# Altium PCB STLINK_Adapter.PcbDoc
Units mm, origin at the board's own origin, x right, y up, seen from the top; angles counter-clockwise.
Board outline 59 x 103 mm, 2 copper layers (Top Layer, Bottom Layer), stack 1.579 mm thick; 31 components, 35 nets, 170 pads, 235 vias.
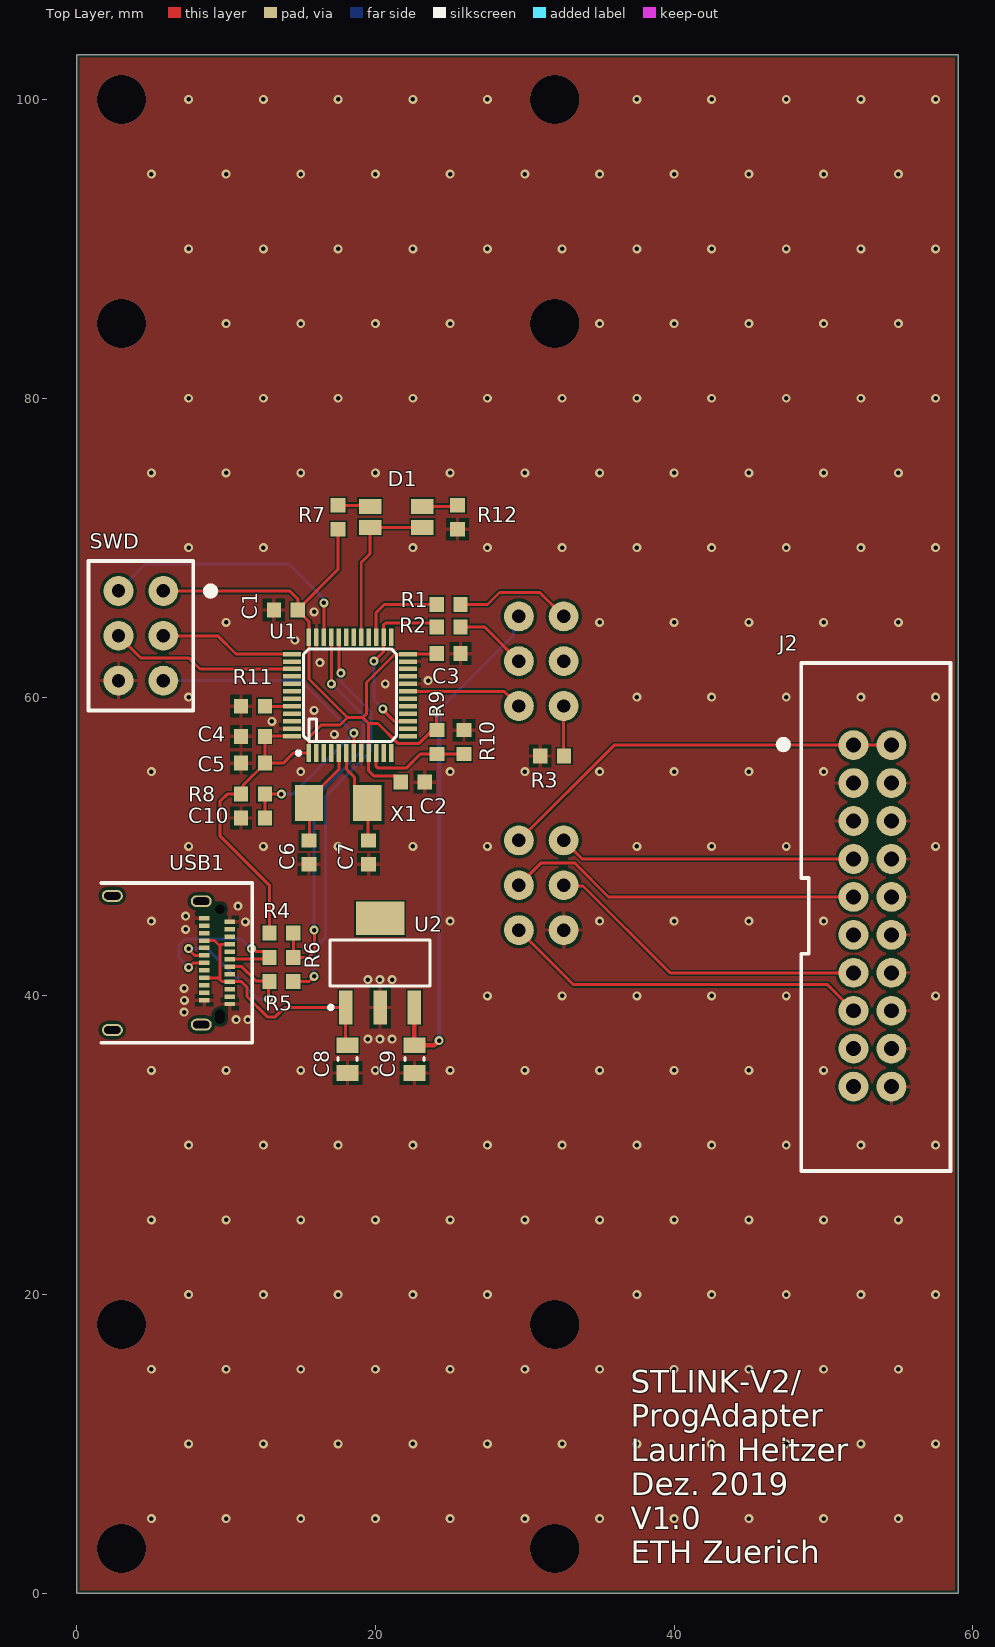
[diagram p0: Top Layer view]
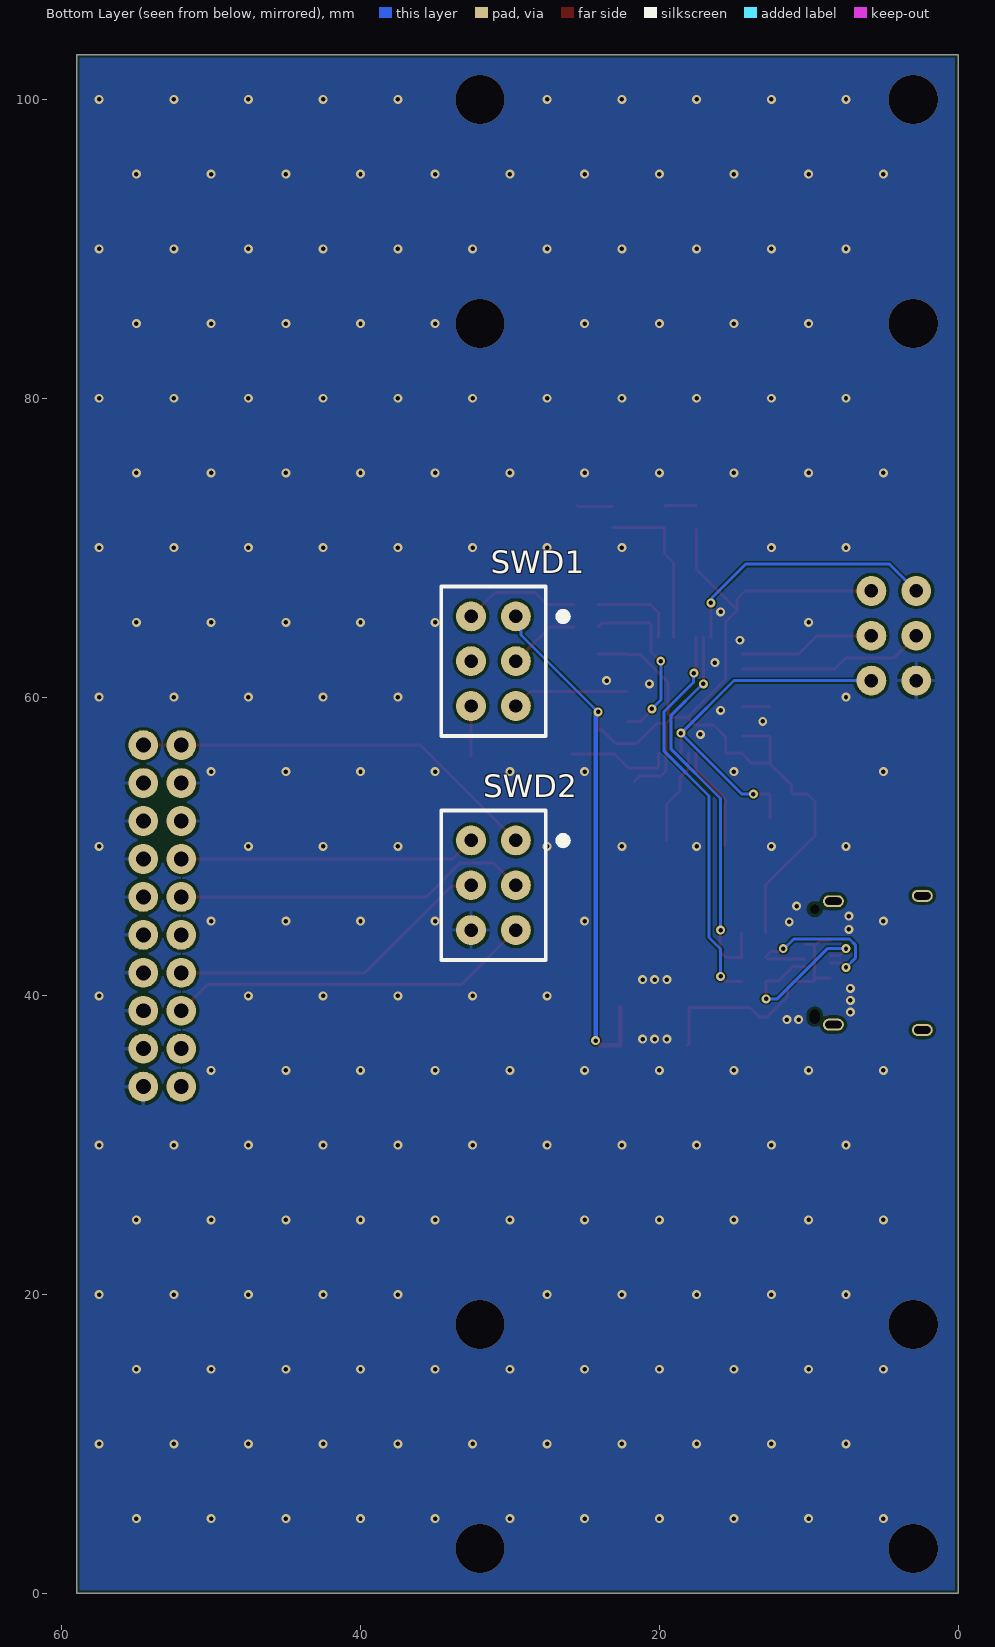
[diagram p1: Bottom Layer view, seen from below]
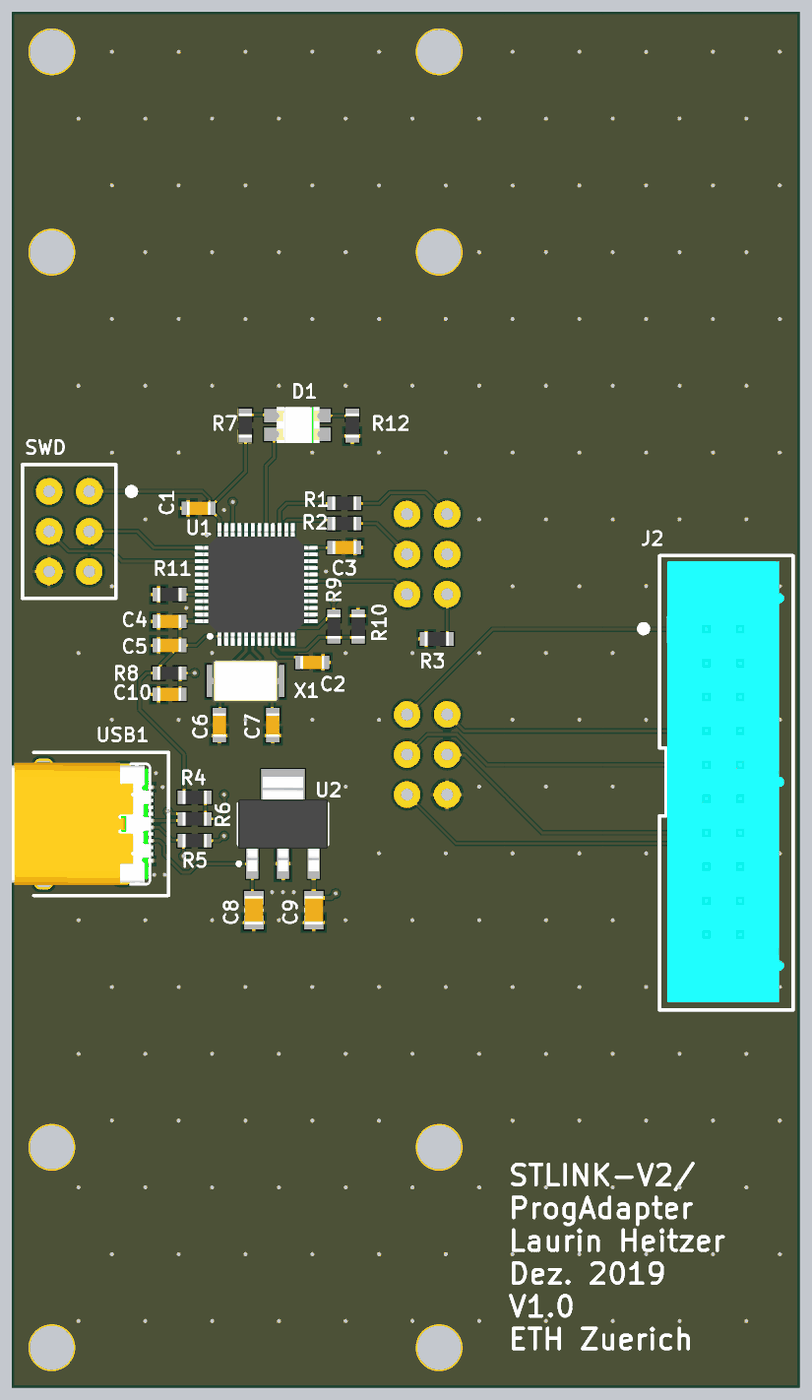
[diagram p2: 3D render of the assembled board from above, using the file's embedded part models]

## Layer stack, top to bottom
Top Solder: solder mask 0.0102, Solder Resist, Dk 3.5
Top Layer: signal copper 0.0356
Dielectric 1: dielectric 1.508, FR-4, Dk 4.8
Bottom Layer: signal copper 0.0356
Bottom Solder: solder mask 0.0102, Solder Resist, Dk 3.5

## Board outline
0,0 59,0 59,103 0,103

## Design rules (kind name [scope] priority, off if disabled: settings)
BoardOutlineClearance [All] p1: gap=0.2 ignorepadtopadclearanceinfootprint=FALSE
Clearance Clearance_1 [(InNet('OSC_IN') OR InNet('OSC_OUT'))] p1: gap=0.1 ignorepadtopadclearanceinfootprint=FALSE except(0.2: Arc-Poly Track-Poly SMDPad-Poly THPad-Poly)
Clearance [All] p2: gap=0.1 ignorepadtopadclearanceinfootprint=FALSE except(0.09: Arc-Poly; 0.2: THPad-Poly)
HoleSize [All] p1: absolutevalues=TRUE maxlimit=6.3 minlimit=0.2 maxpercent=80.000 minpercent=20.000
MinimumSolderMaskSliver [All] p1: minsoldermaskwidth=0.1
PolygonConnect [All] p1: thpad.connectstyle=Relief thpad.reliefconductorwidth=0.254 thpad.reliefentries=4 thpad.polygonreliefangle="90 Angle" thpad.airgapwidth=0.254 smdpad.connectstyle=Relief smdpad.reliefconductorwidth=0.254 smdpad.reliefentries=4 smdpad.polygonreliefangle="90 Angle" smdpad.airgapwidth=0.254 via.connectstyle=Direct via.reliefconductorwidth=0.254 via.reliefentries=4 via.polygonreliefangle="90 Angle" via.airgapwidth=0.254
RoutingVias [All] p1: holewidth=0.3 width=0.6 viastyle="Through Hole" minholewidth=0.3 minwidth=0.6 maxholewidth=6.3 maxwidth=9
SilkToSolderMaskClearance STM_SilkToSolderMaskClearance [HasFootprint('STM32F103CBT_LQFP48')] p1: minsilkscreentomaskgap=0 clearancetoexposedcopper=TRUE
SilkToSolderMaskClearance [IsPad] p2: minsilkscreentomaskgap=0.1 clearancetoexposedcopper=TRUE
SolderMaskExpansion [All] p1: expansion=0.102
Width [All] p1: maxlimit=1 minlimit=0.127 preferedwidth=0.2
27 further rules are at their usual default settings.

## Components (designator, comment, footprint, x,y, rotation, side; value= is the part's Value field where it differs from the comment)
C1 "Capacitor_0603" C_0603_Chip2PinSM127P600-8N 14,65.82 r180 top
C2 "Capacitor_0603" C_0603_Chip2PinSM127P600-8N 22.5,54.3 r0 top
C3 "Capacitor_0603" C_0603_Chip2PinSM127P600-8N 24.9,62.9 r0 top
C4 "Capacitor_0603" C_0603_Chip2PinSM127P600-8N 11.8,57.369 r180 top
C5 "Capacitor_0603" C_0603_Chip2PinSM127P600-8N 11.8,55.573 r180 top
C6 "Capacitor_0603" C_0603_Chip2PinSM127P600-8N 15.55,49.6 r90 top
C7 "Capacitor_0603" C_0603_Chip2PinSM127P600-8N 19.55,49.6 r90 top
C8 "Capacitor_0805" 10uF_0805_Chip2PinSM127P600-8N 18.127,35.754 r270 top
C9 "Capacitor_0805" 10uF_0805_Chip2PinSM127P600-8N 22.611,35.754 r270 top
C10 "Capacitor_0603" C_0603_Chip2PinSM127P600-8N 11.8,51.9 r180 top
D1 "LTST_LED_RED_GREEN" LTST_LED_GREEN_RED 21.396,72.061 r0 top
J2 "JTAG_Header" JTAG_Header 52,56.78 r270 top
R1 "Resistor_0603" R_0603_Chip2PinSM127P600-8N 24.9,66.2 r180 top
R2 "Resistor_0603" R_0603_Chip2PinSM127P600-8N 24.9,64.7 r0 top
R3 "Resistor_0603" R_0603_Chip2PinSM127P600-8N 31.829,56.051 r0 top
R4 "Resistor_0603" R_0603_Chip2PinSM127P600-8N 13.7,44.2 r180 top
R5 "Resistor_0603" R_0603_Chip2PinSM127P600-8N 13.7,40.95 r0 top
R6 "Resistor_0603" R_0603_Chip2PinSM127P600-8N 13.7,42.575 r0 top
R7 "Resistor_0603" R_0603_Chip2PinSM127P600-8N 17.5,72.036 r270 top
R8 "Resistor_0603" R_0603_Chip2PinSM127P600-8N 11.8,53.5 r180 top
R9 "Resistor_0603" R_0603_Chip2PinSM127P600-8N 24.125,56.983 r90 top
R10 "Resistor_0603" R_0603_Chip2PinSM127P600-8N 25.925,56.983 r270 top
R11 "Resistor_0603" R_0603_Chip2PinSM127P600-8N 11.8,59.384 r0 top
R12 "Resistor_0603" R_0603_Chip2PinSM127P600-8N 25.5,72.036 r90 top
SWD "ProgrammingHeader" ProgrammingHeader 5.8,67.1 r270 top
SWD1 "ProgrammingHeader" ProgrammingHeader 29.6,65.4 r270 bottom
SWD2 "ProgrammingHeader" ProgrammingHeader 29.6,50.4 r270 bottom
U1 "STM32F103C8T6" STM32F103CBT_LQFP48 18.3,60.127 r90 top locked
U2 "MIC2920A" MIC2920A_SOT230P710X170-4N 20.311,42.2 r90 top
USB1 "USB-C_simplified" USB-C_receptacle 10.25,44.95 r270 top
X1 "Crystal_8MHz" Crystal_8MHz 17.5,52.9 r180 top

## Footprints (in the part's own frame and the unit in brackets; to place one, negate y for a bottom-side part, rotate by r counter-clockwise, add the part's x,y. Pads: shape width x height; smd on the part's side, far side on the other; paste and mask are expansions set on the pad)
10uF_0805_Chip2PinSM127P600-8N [mm]
  rect 1.05x1.45 smd: 1(-0.925,0) 2(0.925,0)
  silkscreen extent -0.1,-0.63 0.1,0.63, body extent -1.07,-0.7 1.07,0.7, height 1.4
C_0603_Chip2PinSM127P600-8N [mm]
  rect 0.95x1 smd: 1(-0.8,0) 2(0.8,0)
  body extent -0.9,-0.5 0.9,0.5, height 1
Crystal_8MHz [mm]
  rect 1.9x2.4 smd: 1(-1.95,0) 2(1.95,0)
  body extent -2.5,-1.6 2.5,1.6, height 1.4
JTAG_Header [mm]
  round 2 hole 1 mask+0.05: 1(0,0) 2(0,2.54) 3(2.54,0) 4(2.54,2.54) 5(5.08,0) 6(5.08,2.54) 7(7.62,0) 8(7.62,2.54) 9(10.16,0) 10(10.16,2.54) 11(12.7,0) 12(12.7,2.54) 13(15.24,0) 14(15.24,2.54) 15(17.78,0) 16(17.78,2.54) 17(20.32,0) 18(20.32,2.54) 19(22.86,0) 20(22.86,2.54)
  silkscreen extent -5.5,-5.19 28.5,6.5, body extent -5.07,-2.97 27.92,5.84, height 8.89
LTST_LED_GREEN_RED [mm]
  rect 1.5x1 smd: 1(-1.75,0.7) 2(-1.75,-0.7) 3(1.75,0.7) 4(1.75,-0.7)
  body extent -1.55,-1.35 1.65,1.35, height 1.1
MIC2920A_SOT230P710X170-4N [mm] "SOT223, 4-Leads, Body 6.50x7.10mm (avg), Pitch 2.30mm, IPC Medium Density"
  rect 2.25x0.9 smd: 1(-2.98,2.3) 2(-2.98,0) 3(-2.98,-2.3)
  rect 2.25x3.25 smd: 4(2.98,0)
  silkscreen extent -3.1,-3.35 1.55,3.42, body extent -3.55,-3.35 3.55,3.35, height 1.7
ProgrammingHeader [mm]
  round 2 hole 0.9 mask+0.05: 1(0,0) 2(0,-3) 3(3,0) 4(3,-3) 5(6,0) 6(6,-3)
  silkscreen extent -2,-5 8,3.66
R_0603_Chip2PinSM127P600-8N [mm]
  rect 0.95x1 smd: 1(-0.8,0) 2(0.8,0)
  body extent -0.9,-0.5 0.9,0.5, height 1
STM32F103CBT_LQFP48 [mm]
  rect 1.2x0.3 smd mask+0.02: 1(-3.875,2.75) 2(-3.875,2.25) 3(-3.875,1.75) 4(-3.875,1.25) 5(-3.875,0.75) 6(-3.875,0.25) 7(-3.875,-0.25) 8(-3.875,-0.75) 9(-3.875,-1.25) 10(-3.875,-1.75) 11(-3.875,-2.25) 12(-3.875,-2.75) 25(3.875,-2.75) 26(3.875,-2.25) 27(3.875,-1.75) 28(3.875,-1.25) 29(3.875,-0.75) 30(3.875,-0.25) 31(3.875,0.25) 32(3.875,0.75) 33(3.875,1.25) 34(3.875,1.75) 35(3.875,2.25) 36(3.875,2.75)
  rect 0.3x1.2 smd mask+0.02: 13(-2.75,-3.875) 14(-2.25,-3.875) 15(-1.75,-3.875) 16(-1.25,-3.875) 17(-0.75,-3.875) 18(-0.25,-3.875) 19(0.25,-3.875) 20(0.75,-3.875) 21(1.25,-3.875) 22(1.75,-3.875) 23(2.25,-3.875) 24(2.75,-3.875) 37(2.75,3.875) 38(2.25,3.875) 39(1.75,3.875) 40(1.25,3.875) 41(0.75,3.875) 42(0.25,3.875) 43(-0.25,3.875) 44(-0.75,3.875) 45(-1.25,3.875) 46(-1.75,3.875) 47(-2.25,3.875) 48(-2.75,3.875)
  silkscreen extent -4,-3.1 3.1,3.57, body extent -4.6,-4.6 4.6,4.6, height 1.55
USB-C_receptacle [mm]
  rect 0.3x0.7 smd mask+0.05: A1(0,0) A2(0.5,0) A3(1,0) A4(1.5,0) A5(2,0) A6(2.5,0) A7(3,0) A8(3.5,0) A9(4,0) A10(4.5,0) A11(5,0) A12(5.5,0) B1(5.25,-1.7) B2(4.75,-1.7) B3(4.25,-1.7) B4(3.75,-1.7) B5(3.25,-1.7) B6(2.75,-1.7) B7(2.25,-1.7) B8(1.75,-1.7) B9(1.25,-1.7) B10(0.75,-1.7) B11(0.25,-1.7) B12(-0.25,-1.7)
  rrect100% 0.8x1.4 hole 0.5 slot 1.1 at 90 deg mask+0.05: S1(-1.38,-1.91) S2(6.88,-1.91) S3(-1.74,-7.86) S4(7.24,-7.86)
  round 0.3 hole 0.65 mask+0.05: ""(-0.85,-0.66)
  round 0.3 hole 0.65 slot 0.95 at 0 deg mask+0.05: ""(6.35,-0.66)
  silkscreen extent -2.6,-8.6 8.1,1.5, body extent -1.85,-10.25 7.35,0.3, height 3.25

## Part data
C1 C2 C3 C4 C5 C10: Capacity=100nF
C6 C7: Capacity=16pF
C8 C9: Capacity=10µF
R1 R2 R5 R6: Resistance=22
R3: Resistance=10k
R4: Resistance=1k5
R7 R12: Resistance=50
R8 R11: Resistance=100k
R9 R10: Resistance=4k7
U2: library part MIC2920_3V3_VoltageReg, ComponentLink1Description=Datasheet, ComponentLink1URL=http://ww1.microchip.com/downloads/en/DeviceDoc/mic2920.pdf, ComponentLink2Description="MIC2920A-3.3WS-TR - Digikey", ComponentLink2URL=https://www.digikey.ch/product-detail/de/microchip-technology/MIC2920A-3.3WS-TR/576-1116-1-ND/771849
USB1: "USB Type C receptacle simplified with just data and supply pins", ComponentLink1Description="Datasheet (Drawing)", ComponentLink1URL=https://www.amphenol-icc.com/media/wysiwyg/files/drawing/12401610e4x2a.pdf, ComponentLink2Description="USB - C, USB 3.1 Gen 2 - Digikey", ComponentLink2URL=https://www.digikey.ch/product-detail/de/amphenol-icc-commercial-products/12401610E4-2A/12401610E4-2ACT-ND/5775520
X1: "8MHz Crystall SMD", ComponentLink1Description=Datasheet, ComponentLink1URL=https://ecsxtal.com/store/pdf/ecx-53r.pdf, ComponentLink2Description="ECS-.327-6-34QCN-TR - Digikey", ComponentLink2URL=https://www.digikey.ch/product-detail/de/ecs-inc/ECS-80-18-30-JGN-TR/XC2103CT-ND/5875587

## Via types
v1: diameter 0.6, hole 0.3, Top Layer to Bottom Layer, tented both sides, 227 vias
v2: diameter 3.3, hole 3.3, Top Layer to Bottom Layer, 8 vias

## Nets (pads, with @x,y where several pads share a name; then routed paths per layer and width w, separated by ;. In a path a pad name is that pad's centre, name@x,y a point inside that pad or via, vN(x,y) a via of type N, cw(c..) or ccw(c..) an arc to the next point about the centre after c; other vN are vias at no path point)
3.3V: C1.1 C2.1 C3.1 C4.1 C5.1 C9.1 R4.2 R7.2 R8.2 R9.2 SWD1.1 SWD.1 U1.1 U1.9 U1.24 U1.36 U1.48 U2.3 | length 107.6
  Top Layer w0.2: SWD.1 14.269,67.1 14.8,66.569 C1.1@14.8,65.845 ; R4.2 12.9,47.4 9.583,50.717 9.583,53 10.083,53.5 R8.2 11.138,53.638 11.138,54.086 12.6,55.548 C5.1 ; U1.48 12.608,57.377 C4.1 C5.1 ; R7.2 17.5,68.545 C1.1@14.8,65.845 ; C2.1 21.7,54.325 21.325,54.7 21.3,54.7 21.296,54.704 19.9,54.704 19.55,55.054 U1.9 19.55,58.227 ; v1(24.1,59) 24.1,57.808 R9.2 23.812,57.783 22.929,56.9 21.493,56.9 20.167,58.227 19.55,58.227 ; C3.1 24.077,62.877 U1.24 22.146,62.848 21.275,62.848 19.4,60.973 19.4,58.877 19.15,58.627 ; C5.1 13.821,55.573 14.5,56.252 U1.1 15.55,57.307 16.366,58.123 17.629,58.123 18.133,58.627 ; C1.1@14.8,65.845 C1.1 14.8,65.795 15.55,65.045 U1.36 15.55,61.209 18.133,58.627 ; 18.133,58.627 19.15,58.627 ; 19.15,58.627 19.55,58.227
  Top Layer w0.3: U2.3 C9.1 23.935,36.679 v1(24.256,37)
  Bottom Layer w0.2: v1(24.1,59) 29.256,64.156 29.256,65.056 SWD1.1
  Bottom Layer w0.3: v1(24.1,59) 24.1,58.919 24.256,58.763 v1(24.256,37)
3V3: J2.1 J2.2 SWD2.1 | length 27.6
  Top Layer w0.2: SWD2.1 35.98,56.78 J2.1 J2.2
+5: C8.1 U2.1 USB1.A4 USB1.A9 USB1.B4 USB1.B9 | length 17.9
  Top Layer w0.2: USB1.B4 9.477,41.2 9.6,41.077 ; USB1.B9 9.233,43.7 9.6,43.333 ; USB1.A4 9.717,43.45 9.6,43.333 ; C8.1 18.011,36.795 U2.1 13.931,39.22 13.3,38.589 12.765,38.589 11.4,39.954 11.4,40.573 11.023,40.95 USB1.A9 9.727,40.95 9.6,41.077 ; 9.6,41.077 9.6,43.333
BOOT0: R11.2 U1.44 | length 1.8
  Top Layer w0.2: R11.2 12.607,59.377 U1.44
GND: C1.2 C2.2 C3.2 C4.2 C5.2 C6.1 C7.1 C8.2 C9.2 C10.2 J2.3 J2.4 J2.5 J2.6 J2.8 J2.10 J2.12 J2.14 J2.16 J2.18 J2.20 R3.1 R10.1 R11.1 R12.1 SWD2.6 SWD.6 U1.8 U1.20 U1.23 U1.35 U1.47 U2.2 USB1.A1 USB1.A12 USB1.B1 USB1.B12
  other v1: 5,5 10,5 15,5 20,5 25,5 30,5 35,5 40,5 45,5 50,5 55,5 7.5,10 12.5,10 17.5,10 22.5,10 27.5,10 32.5,10 37.5,10 42.5,10 47.5,10 52.5,10 57.5,10 5,15 10,15 15,15 20,15 25,15 30,15 35,15 40,15 45,15 50,15 55,15 7.5,20 12.5,20 17.5,20 22.5,20 27.5,20 37.5,20 42.5,20 47.5,20 52.5,20 57.5,20 5,25 10,25 15,25 20,25 25,25 30,25 35,25 40,25 45,25 50,25 55,25 7.5,30 12.5,30 17.5,30 22.5,30 27.5,30 32.5,30 37.5,30 42.5,30 47.5,30 52.5,30 57.5,30 5,35 10,35 15,35 20,35 25,35 30,35 35,35 40,35 45,35 50,35 19.492,37.1 20.304,37.1 21.116,37.1 10.667,38.4 11.461,38.4 7.2,38.9 7.212,39.7 27.5,40 32.5,40 37.5,40 42.5,40 47.5,40 57.5,40 7.2,40.5 19.492,41.077 20.304,41.077 21.116,41.077 7.3,44.45 11.3,44.95 5,45 25,45 35,45 40,45 45,45 50,45 7.3,45.327 10.8,46.005 7.5,50 12.5,50 17.5,50 22.5,50 27.5,50 37.5,50 42.5,50 47.5,50 57.5,50 5,55 15,55 25,55 30,55 35,55 40,55 45,55 50,55 17.244,57.5 13.073,58.377 15.9,59.1 7.5,60 37.5,60 42.5,60 47.5,60 52.5,60 57.5,60 20.656,60.877 23.525,61.1 16.277,62.3 14.6,63.8 10,65 35,65 40,65 45,65 50,65 55,65 15.9,65.7 7.5,70 12.5,70 22.5,70 27.5,70 32.5,70 37.5,70 42.5,70 47.5,70 52.5,70 57.5,70 5,75 10,75 15,75 20,75 25,75 30,75 35,75 40,75 45,75 50,75 55,75 7.5,80 12.5,80 17.5,80 22.5,80 27.5,80 32.5,80 37.5,80 42.5,80 47.5,80 52.5,80 57.5,80 10,85 15,85 20,85 25,85 35,85 40,85 45,85 50,85 55,85 7.5,90 12.5,90 17.5,90 22.5,90 27.5,90 32.5,90 37.5,90 42.5,90 47.5,90 52.5,90 57.5,90 5,95 10,95 15,95 20,95 25,95 30,95 35,95 40,95 45,95 50,95 55,95 7.5,100 12.5,100 17.5,100 22.5,100 27.5,100 37.5,100 42.5,100 47.5,100 52.5,100 57.5,100
  other v2: 3,3 32,3 3,18 32,18 3,85 32,85 3,100 32,100
JTAG_CTL: U1.4
LED: D1.2 D1.4 U1.29 | length 11.1
  Top Layer w0.2: U1.29 19.05,69.004 19.646,69.6 D1.2 D1.4
NetD1_1: D1.1 R7.1 | length 2.2
  Top Layer w0.2: R7.1 19.571,72.836 D1.1
NetD1_3: D1.3 R12.2 | length 2.4
  Top Layer w0.2: D1.3 25.425,72.761 R12.2
NetR1_1: R1.1 SWD1.2 | length 7.9
  Top Layer w0.2: R1.1 27.5,66.2 28.3,67 31,67 SWD1.2
NetR2_2: R2.2 SWD1.3 | length 4.9
  Top Layer w0.2: R2.2 27.3,64.7 SWD1.3
NetR3_2: R3.2 SWD1.6 | length 3.4
  Top Layer w0.2: SWD1.6 32.6,56.08 R3.2
NetR5_1: R5.1 USB1.A7 USB1.B7 | length 12.2
  Top Layer w0.2: v1(7.5,43.152) 7.5,43.1 7.9,42.7 USB1.B7 ; USB1.A7 11.05,41.95 12,41 12.85,41 v1(12.85,39.8)
  Bottom Layer w0.2: v1(7.5,43.152) 8.748,43.152 12.1,39.8 v1(12.85,39.8)
NetR6_1: R6.1 USB1.A6 USB1.B6 | length 12.4
  Top Layer w0.2: v1(7.5,41.9) 7.8,42.2 USB1.B6 ; USB1.A6 12.75,42.45 12.9,42.6 12.525,42.975 11.985,42.975 11.808,43.152 v1(11.7,43.152)
  Bottom Layer w0.2: v1(7.5,41.9) 6.848,42.552 6.848,43.383 7.26,43.795 11.005,43.795 11.648,43.152 v1(11.7,43.152)
NRST: J2.15 SWD2.5 | length 24.6
  Top Layer w0.2: SWD2.5 33.254,40.746 50.254,40.746 J2.15
OSC_IN: C6.2 U1.5 X1.2 | length 7.1
  Top Layer w0.2: C6.2@15.6,50.039 15.6,52.85 X1.2 15.55,53.15 17.55,55.15 U1.5
OSC_OUT: C7.2 U1.6 X1.1 | length 6.5
  Top Layer w0.2: U1.6 18.05,55.176 18.6,54.626 18.6,53.75 X1.1 19.5,52.85 C7.2@19.5,50.4
PA0: R9.1 R10.2 U1.10 | length 7.2
  Top Layer w0.2: U1.10 20.05,55.352 20.167,55.235 22.054,55.235 23.003,56.183 R9.1 R10.2
RST: C10.1 R8.1 SWD.5 U1.7 | length 24.8
  Top Layer w0.2: C10.1 R8.1 v1(13.7,53.5) ; U1.7 v1(18.55,57.581)
  Bottom Layer w0.2: SWD.5 15,61.1 18.5,57.6 18.531,57.6 v1(18.55,57.581) 14.469,53.5 v1(13.7,53.5)
STM_JRST: U1.40
STM_JTCK: SWD.3 U1.37 | length 9.1
  Top Layer w0.2: SWD.3 9.444,64.1 10.667,62.877 U1.37
STM_JTDI: U1.38
STM_JTDO: SWD.4 U1.39 | length 12.5
  Top Layer w0.2: SWD.4 4.273,62.627 7.5,62.627 8.25,61.877 U1.39
STM_JTMS: SWD.2 U1.34 | length 18
  Top Layer w0.2: v1(16.544,66.3) 16.547,66.297 16.547,64.005 U1.34
  Bottom Layer w0.2: SWD.2 4.6,68.9 14.21,68.9 16.5,66.61 16.5,66.344 v1(16.544,66.3)
SWCLK: J2.9 SWD2.3 | length 24
  Top Layer w0.2: SWD2.3 31.1,48.9 33.326,48.9 35.606,46.62 J2.9
SWDIO: J2.7 SWD2.2 | length 19.9
  Top Layer w0.2: SWD2.2 33.84,49.16 J2.7
T_JRST: SWD1.5 U1.19 | length 7.8
  Top Layer w0.2: U1.19 28.623,60.377 SWD1.5
T_JTCK: R2.1 U1.15 U1.26 | length 12
  Top Layer w0.2: v1(19.9,62.4) 20.55,63.05 U1.26 20.55,64.839 20.667,64.956 23.844,64.956 R2.1 ; v1(20.5,59.2) 20.55,59.15 20.55,59.087 21.26,58.377 U1.15
  Bottom Layer w0.2: v1@19.8,62.4 v1(19.9,62.4) 19.9,59.8 v1(20.5,59.2)
T_JTDI: U1.17
T_JTDO: U1.16
T_JTMS: R1.2 U1.27 | length 5.9
  Top Layer w0.2: U1.27 20.05,65.661 20.589,66.2 R1.2
T_NRST: U1.18
TRACESWO: J2.13 SWD2.4 | length 21.8
  Top Layer w0.2: SWD2.4 32.644,47.356 33.9,47.356 39.716,41.54 J2.13
USB_DM: R5.2 U1.32 | length 26.7
  Top Layer w0.2: R5.2 15.55,40.95 v1(15.9,41.3) ; U1.32 17.55,61.847 17.688,61.708 v1(17.688,61.6)
  Bottom Layer w0.2: v1(15.9,41.3) 15.9,43.127 16.673,43.9 16.673,53.377 19.696,56.4 19.696,59.004 17.7,61 17.7,61.588 v1(17.688,61.6)
USB_DP: R4.1 R6.2 U1.33 | length 26.5
  Top Layer w0.2: R4.1 R6.2 15.527,42.575 15.927,42.975 15.927,44.373 v1(15.9,44.4) ; v1(17.05,60.877) U1.33
  Bottom Layer w0.2: v1(15.9,44.4) 15.9,53.2 19.2,56.5 19.2,58.773 17.2,60.773 17.154,60.773 v1(17.05,60.877)
pads on no net: J2.11 J2.17 J2.19 SWD1.4 U1.2 U1.3 U1.11 U1.12 U1.13 U1.14 U1.21 U1.22 U1.25 U1.28 U1.30 U1.31 U1.41 U1.42 U1.43 U1.45 U1.46 U2.4 USB1. USB1.A2 USB1.A3 USB1.A5 USB1.A8 USB1.A10 USB1.A11 USB1.B2 USB1.B3 USB1.B5 USB1.B8 USB1.B10 USB1.B11 USB1.S1 USB1.S2 USB1.S3 USB1.S4

## Polygon pours and split planes (outlines as drawn)
GND on Bottom Layer "Bottom Layer-GND" (solid, pour order 0): 0,0 59,0 59,103 0,103
GND on Top Layer "Top Layer-GND" (solid, pour order 2): 0,0 59,0 59,103 0,103

## Silkscreen, mask and mechanical layers (free items; w line width, h text height)
Top Overlay:
  text "STLINK-V2/ / ProgAdapter / Laurin Heitzer / Dez. 2019 / V1.0 / ETH Zuerich" at 37.1,2 h1.52
Outline:
  the board outline again, w0.1